# Altium PCB PCB1.PcbDoc (part 1 of 12)
Units mm, origin at the board's own origin, x right, y up, seen from the top; angles counter-clockwise.
Board outline 122.17 x 121.67 mm, 2 copper layers (Top Layer, Bottom Layer); 274 components, 225 nets, 941 pads, 421 vias.
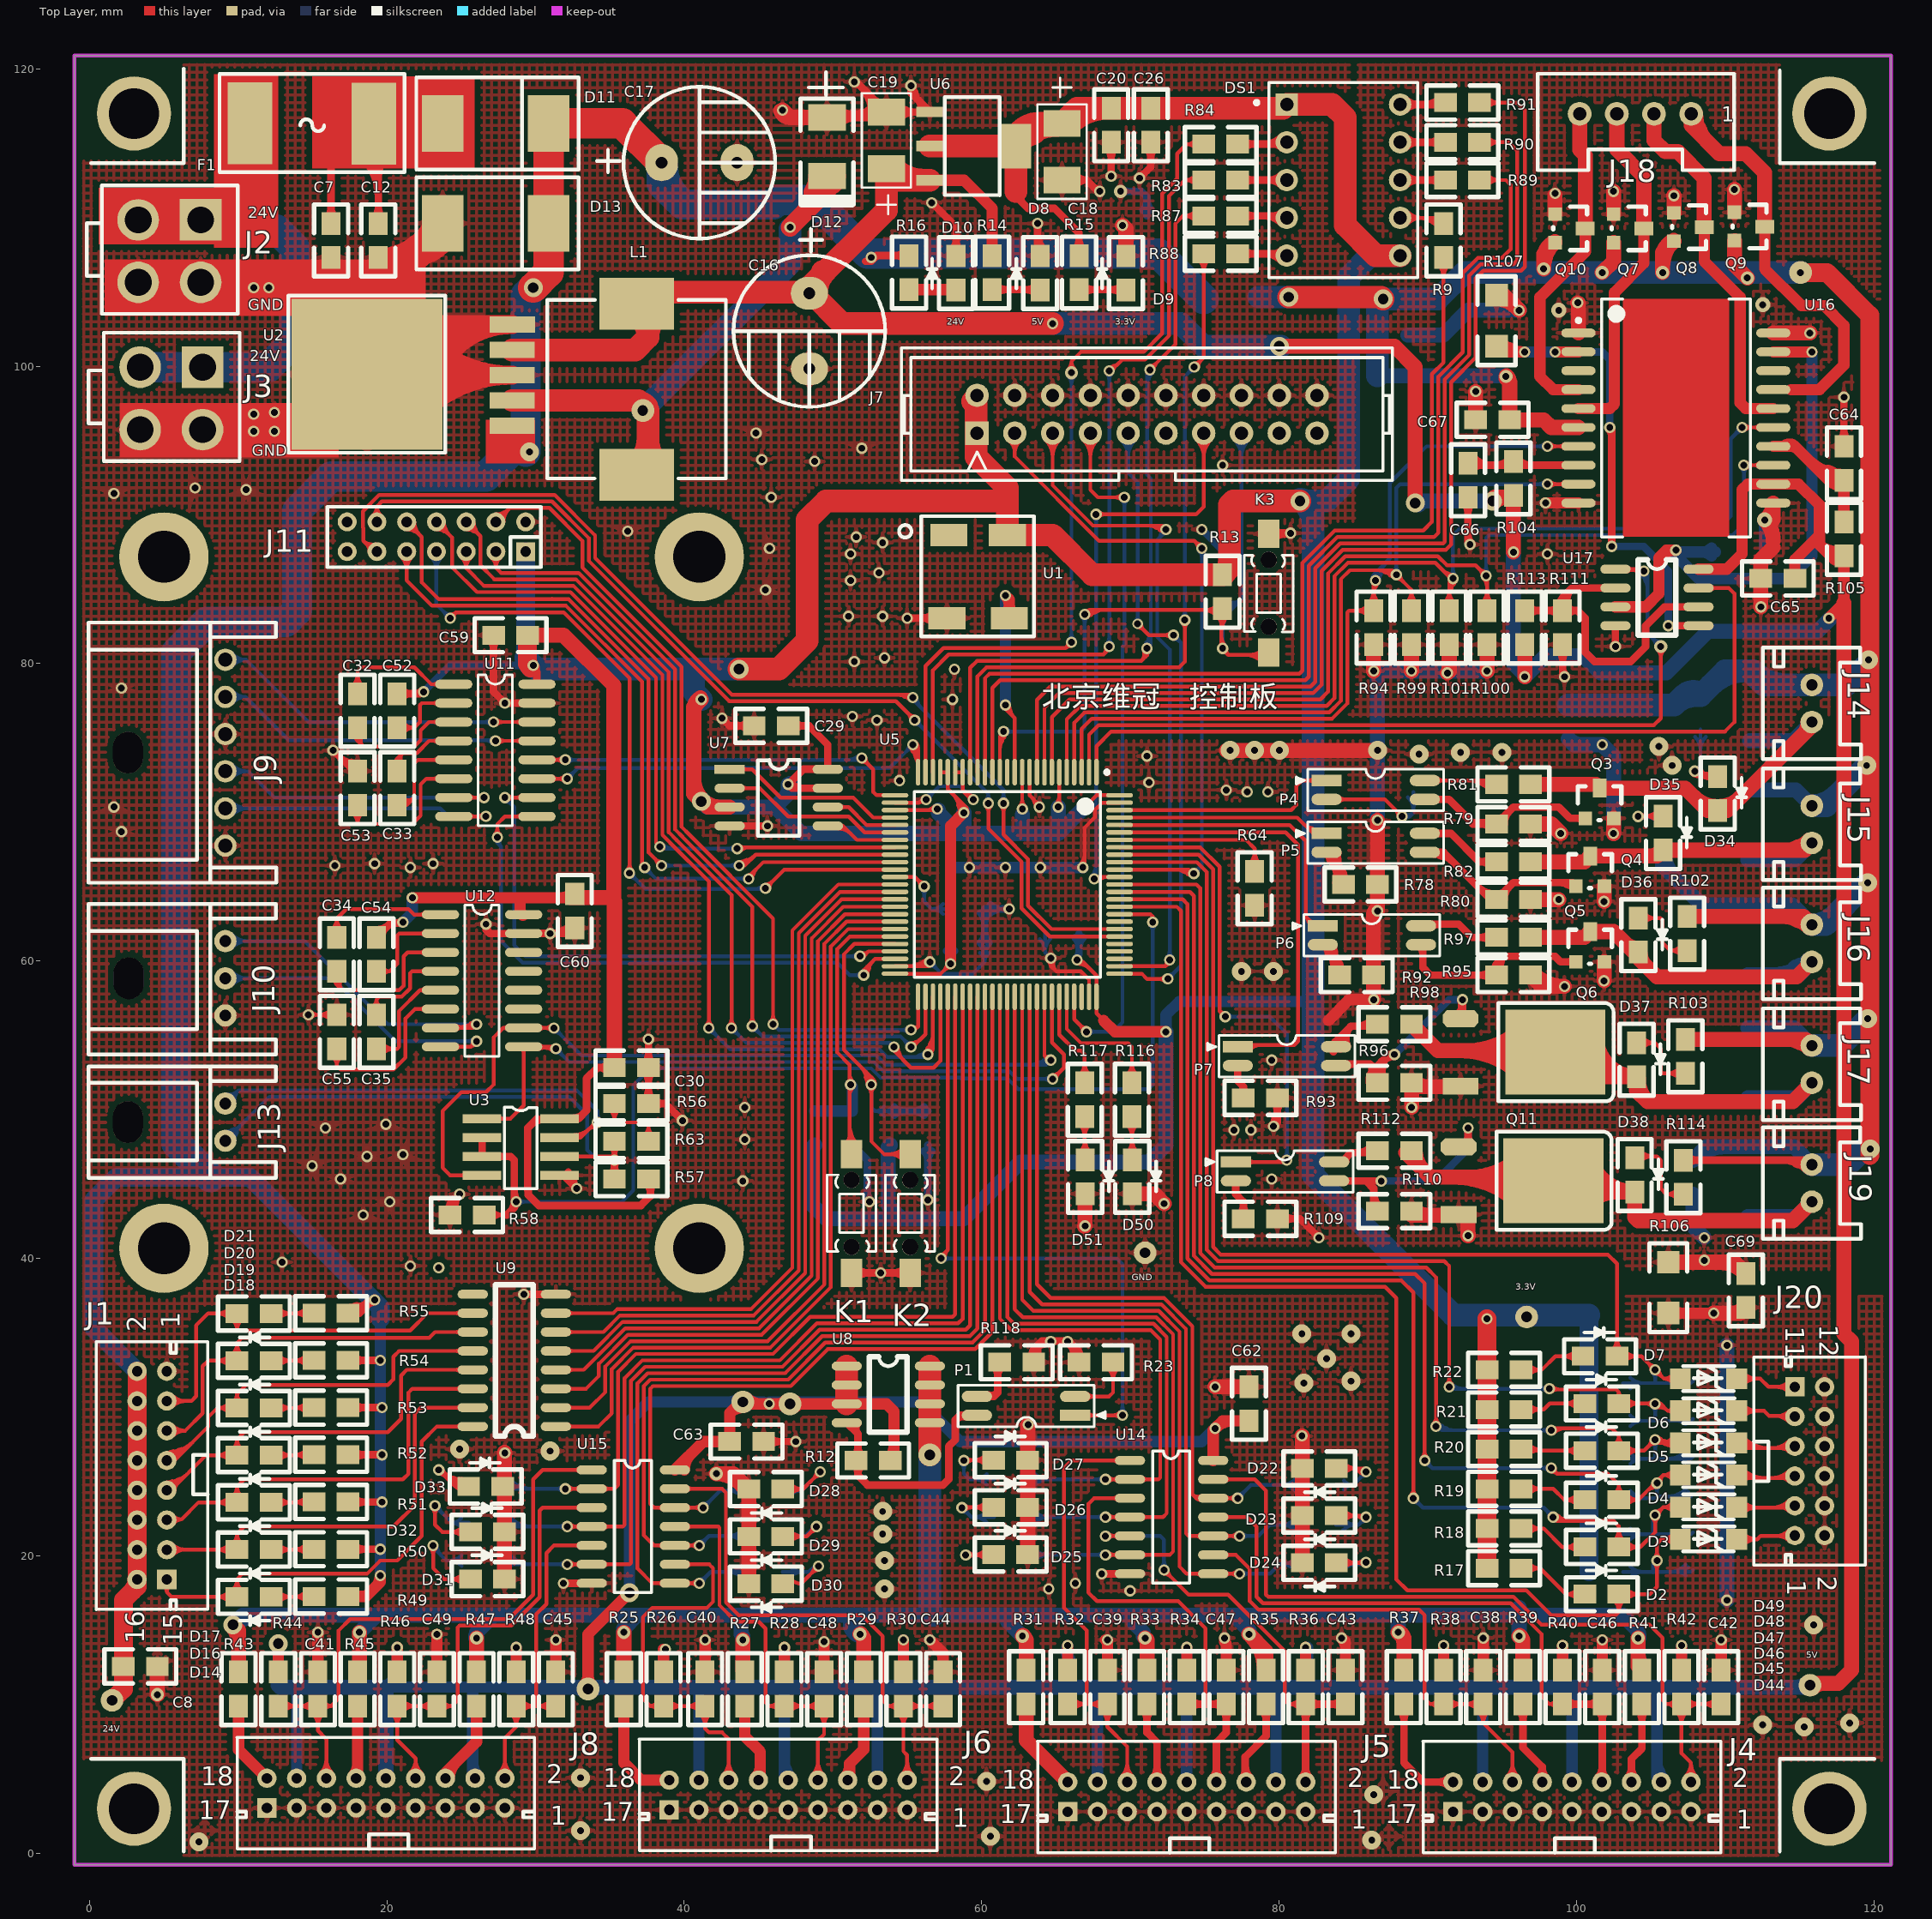
[diagram p0: Top Layer view]
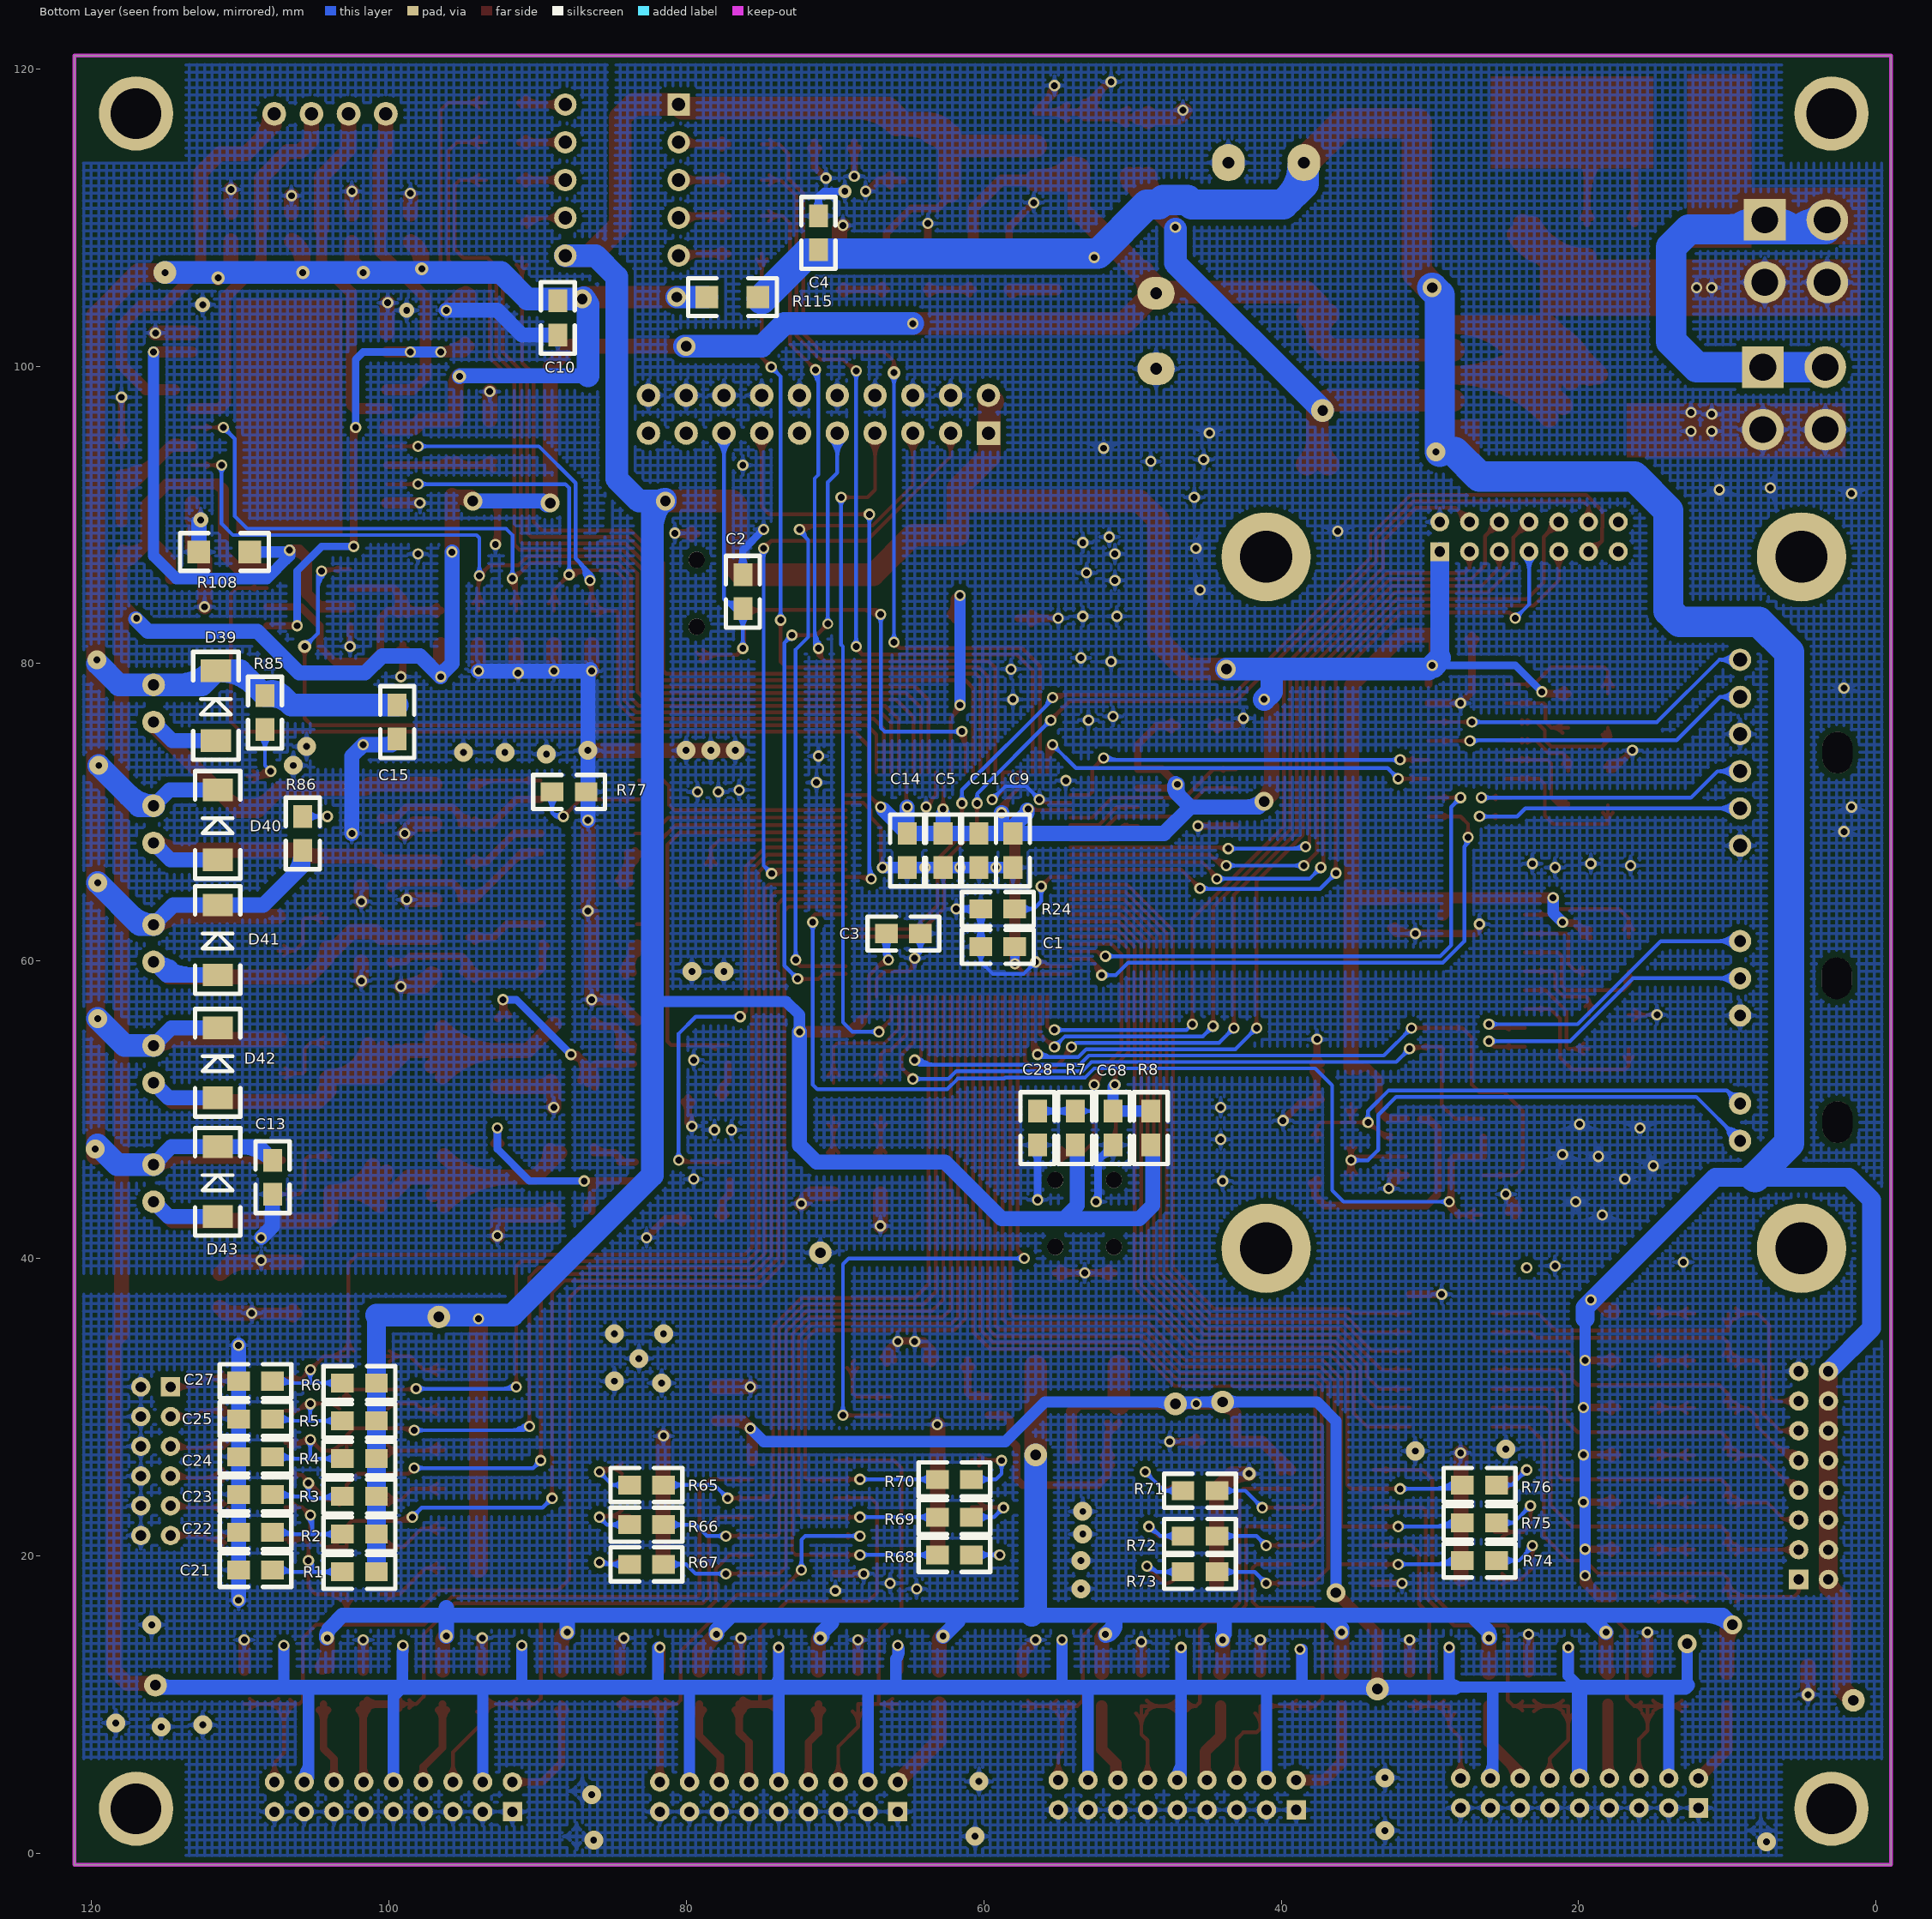
[diagram p1: Bottom Layer view, seen from below]

## Layer stack, top to bottom
Top Layer: signal copper 0.0356
Dielectric: core 0.32, FR-4, Dk 4.8
Bottom Layer: signal copper 0.0356

## Board outline
-1.016,-0.762 -1.016,120.904 121.158,120.904 121.158,-0.762

## Design rules (kind name [scope] priority, off if disabled: settings)
Clearance [All] p1: gap=0.178
ComponentClearance [All] p1 off: gap=0.254 collisioncheckmode=3 verticalgap=0.254 showdistances=FALSE
PolygonConnect [All] p1: connectstyle=Relief reliefconductorwidth=0.254 reliefentries=4 polygonreliefangle="90 Angle" airgapwidth=0.254
RoutingVias [All] p1: holewidth=2.54 width=1.27 viastyle="Through Hole" minholewidth=0.254 minwidth=0.508 maxholewidth=0.711 maxwidth=5.08
SilkToSilkClearance [All] p1 off: silktosilkclearance=0.254
SolderMaskExpansion [All] p1: expansion=0.102
Width [All] p1: maxlimit=2.54 minlimit=0.025 preferedwidth=0.254
26 further rules are at their usual default settings.

## Components (designator, comment, footprint, x,y, rotation, side; value= is the part's Value field where it differs from the comment)
C1 "100nF-0805-50V-20%" 0805 57.912,60.96 r0 bottom
C2 "100nF-0805-50V-20%" 0805 76.2,85.979 r270 bottom
C3 "100nF-0805-50V-20%" 0805 66.548,61.849 r180 bottom
C4 "100nF-0805-50V-20%" 0805 71.12,107.823 r90 bottom
C5 "100nF-0805-50V-20%" 0805 62.738,66.294 r90 bottom
C7 "100nF-0805-50V-20%" 0805 16.256,109.601 r270 top
C8 "100nF-0805-50V-20%" 0805 2.286,12.573 r0 top
C9 "100nF-0805-50V-20%" 0805 58.039,68.58 r270 bottom
C10 "100nF-0805-50V-20%" 0805 88.646,104.394 r270 bottom
C11 "100nF-0805-50V-20%" 0805 60.325,68.58 r270 bottom
C12 "10nF-0805-50V-20%" 0805 19.431,109.601 r270 top
C13 "100nF-0805-50V-20%" 0805 107.823,46.609 r270 bottom
C14 "100nF-0805-50V-20%" 0805 65.151,68.58 r270 bottom
C15 "100nF-0805-50V-20%" 0805 99.441,77.216 r270 bottom
C16 "'16V-YXA-330UF-20%  8*11.5" RB.2/.4 48.514,102.616 r0 top
C17 "35YXF1000MEFC1V12.5*25" RB.2/.4 40.767,113.792 r90 top
C18 "10uF-1411-16V-20%" 1411-B 65.405,116.332 r270 top
C19 "10uF-1411-16V-20%" 1411-B 53.594,113.284 r90 top
C20 "100nF-0805-50V-20%" 0805 68.707,117.348 r270 top
C21 "100nF-0805-50V-20%" 0805 110.109,19.05 r180 bottom
C22 "100nF-0805-50V-20%" 0805 110.109,21.59 r180 bottom
C23 "100nF-0805-50V-20%" 0805 110.109,24.13 r180 bottom
C24 "100nF-0805-50V-20%" 0805 110.109,26.67 r180 bottom
C25 "100nF-0805-50V-20%" 0805 110.109,29.21 r180 bottom
C26 "10nF-0805-50V-20%" 0805 71.374,117.348 r270 top
C27 "100nF-0805-50V-20%" 0805 110.109,31.75 r180 bottom
C28 "100nF-0805-50V-20%" 0805 56.388,49.911 r270 bottom
C29 "100nF-0805-50V-20%" 0805 46.99,75.819 r180 top
C30 "100nF-0805-50V-20%" 0805 35.306,52.832 r0 top
C32 "100nF-0805-50V-20%" 0805 18.034,75.692 r90 top
C33 "100nF-0805-50V-20%" 0805 20.701,72.771 r270 top
C34 "100nF-0805-50V-20%" 0805 16.637,59.309 r90 top
C35 "100nF-0805-50V-20%" 0805 19.304,56.388 r270 top
C38 "1nF-0805-50V-20%" 0805 93.726,10.033 r90 top
C39 "1nF-0805-50V-20%" 0805 68.453,10.033 r90 top
C40 "1nF-0805-50V-20%" 0805 41.402,9.906 r90 top
C41 "1nF-0805-50V-20%" 0805 15.367,9.906 r90 top
C42 "1nF-0805-50V-20%" 0805 109.728,10.033 r90 top
C43 "1nF-0805-50V-20%" 0805 84.455,10.033 r90 top
C44 "1nF-0805-50V-20%" 0805 57.404,9.906 r90 top
C45 "1nF-0805-50V-20%" 0805 31.369,9.906 r90 top
C46 "1nF-0805-50V-20%" 0805 101.727,10.033 r90 top
C47 "1nF-0805-50V-20%" 0805 76.454,10.033 r90 top
C48 "1nF-0805-50V-20%" 0805 49.403,9.906 r90 top
C49 "1nF-0805-50V-20%" 0805 23.368,9.906 r90 top
C52 "100nF-0805-50V-20%" 0805 20.701,75.692 r90 top
C53 "100nF-0805-50V-20%" 0805 18.034,70.485 r90 top
C54 "100nF-0805-50V-20%" 0805 19.304,59.309 r90 top
C55 "100nF-0805-50V-20%" 0805 16.637,54.102 r90 top
C59 "100nF-0805-50V-20%" 0805 29.464,81.915 r180 top
C60 "100nF-0805-50V-20%" 0805 32.639,64.516 r270 top
C62 "100nF-0805-50V-20%" 0805 77.978,29.083 r90 top
C63 "100nF-0805-50V-20%" 0805 43.053,27.686 r0 top
C64 "100nF-0805-50V-20%" 0805 117.983,92.329 r90 top
C65 "100nF-0805-50V-20%" 0805 114.681,85.725 r180 top
C66 "100nF-0805-50V-20%" 0805 92.71,91.186 r90 top
C67 "100nF-0805-50V-20%" 0805 95.504,96.393 r180 top
C68 "100nF-0805-50V-20%" 0805 51.308,49.911 r270 bottom
C69 "100nF-0805-50V-20%" 0805 111.379,36.703 r90 top
D2 "LED-0805-GREEN" LED-0805 100.584,17.526 r0 top
D3 "LED-0805-GREEN" LED-0805 100.584,20.701 r0 top
D4 "LED-0805-GREEN" LED-0805 100.584,23.876 r0 top
D5 "LED-0805-GREEN" LED-0805 100.584,27.178 r0 top
D6 "LED-0805-GREEN" LED-0805 100.584,30.353 r0 top
D7 "LED-0805-GREEN" LED-0805 100.457,33.528 r0 top
D8 "LED-0805-GREEN" LED-0805 63.834,105.156 r90 top
D9 "LED-0805-GREEN" LED-0805 69.596,105.156 r90 top
D10 "LED-0805-GREEN" LED-0805 58.166,105.156 r90 top
D11 "B540C" SMC 23.749,116.332 r0 top
D12 "1N5822" "IN5822 SMT" 49.403,114.808 r180 top
D13 "SMCJ30A-TR" SMC 23.749,109.601 r0 top
D14 "LED-0805-GREEN" LED-0805 12.192,17.145 r180 top
D16 "LED-0805-GREEN" LED-0805 12.192,20.32 r180 top
D17 "LED-0805-GREEN" LED-0805 12.192,23.495 r180 top
D18 "LED-0805-GREEN" LED-0805 12.192,26.67 r180 top
D19 "LED-0805-GREEN" LED-0805 12.192,29.845 r180 top
D20 "LED-0805-GREEN" LED-0805 12.192,33.02 r180 top
D21 "LED-0805-GREEN" LED-0805 12.192,36.195 r180 top
D22 "LED-0805-GREEN" LED-0805 83.82,25.781 r180 top
D23 "LED-0805-GREEN" LED-0805 83.82,22.606 r180 top
D24 "LED-0805-GREEN" LED-0805 83.82,19.431 r180 top
D25 "LED-0805-GREEN" LED-0805 60.833,20.193 r0 top
D26 "LED-0805-GREEN" LED-0805 60.833,23.368 r0 top
D27 "LED-0805-GREEN" LED-0805 60.833,26.543 r0 top
D28 "LED-0805-GREEN" LED-0805 46.609,24.384 r180 top
D29 "LED-0805-GREEN" LED-0805 46.609,21.209 r180 top
D30 "LED-0805-GREEN" LED-0805 46.609,18.034 r180 top
D31 "LED-0805-GREEN" LED-0805 25.654,18.542 r0 top
D32 "LED-0805-GREEN" LED-0805 25.654,21.717 r0 top
D33 "LED-0805-GREEN" LED-0805 25.527,24.765 r0 top
D34 "LED-0805-GREEN" LED-0805 109.601,72.39 r270 top
D35 "LED-0805-GREEN" LED-0805 105.918,69.723 r270 top
D36 "LED-0805-GREEN" LED-0805 104.267,62.865 r270 top
D37 "LED-0805-GREEN" LED-0805 104.14,54.483 r270 top
D38 "LED-0805-GREEN" LED-0805 104.013,46.736 r270 top
D39 "FR107" DO-214AC 111.633,74.803 r90 bottom
D40 "FR107" DO-214AC 111.506,66.802 r90 bottom
D41 "FR107" DO-214AC 111.506,59.055 r90 bottom
D42 "FR107" DO-214AC 111.506,50.8 r90 bottom
D43 "FR107" DO-214AC 111.506,42.799 r90 bottom
D44 "LL60P" DIODE 109.728,18.796 r270 top
D45 "LL60P" DIODE 109.728,20.955 r270 top
D46 "LL60P" DIODE 109.728,23.114 r270 top
D47 "LL60P" DIODE 109.728,25.273 r270 top
D48 "LL60P" DIODE 109.728,27.432 r270 top
D49 "LL60P" DIODE 109.728,29.591 r270 top
D50 "LED-0805-GREEN" LED-0805 70.231,46.609 r270 top
D51 "LED-0805-GREEN" LED-0805 67.056,46.609 r270 top
DS1 "SM430391N" LEDDIP-10 88.138,117.602 r0 top
F1 "FSMD185-2920" 2920 14.986,116.205 r180 top
J1 "A2008WVA-2X8P" A2008WVA-2X8P 5.207,18.415 r90 top
J2 "C4201WV-2*2P" "MX4 .2- 2*2P-180" 5.334,107.569 r0 top
J3 "C4201WV-2*2P" "MX4 .2- 2*2P-180" 5.461,97.663 r0 top
J4 "A2008WVA-2X9P" A2008WVA-2X9P 91.694,2.794 r0 top
J5 "A2008WVA-2X9P" A2008WVA-2X9P 65.786,2.794 r0 top
J6 "A2008WVA-2X9P" A2008WVA-2X9P 38.989,2.921 r0 top
J7 "A2547WV-N-2X10P" JTAG_20 71.12,96.774 r0 top
J8 "A2008WVA-2X9P" A2008WVA-2X9P 11.938,3.048 r0 top
J9 "A2508WR-F-6P" "2.5-6P  90 JXT" 9.144,80.264 r270 top
J10 "A2508WR-F-3P" "2.5-3P  90 JXT" 9.144,61.341 r270 top
J11 "IDC14-2.0-F" IDC14-2.0-F 29.337,89.535 r180 top
J13 "A2508WR-F-2P" "2.5-2P  90 JXT" 9.144,50.419 r270 top
J14 "A2508WV-2P" "2.5-2P  180 JXT" 115.824,76.073 r90 top
J15 "A2508WV-2P" "2.5-2P  180 JXT" 115.824,67.945 r90 top
J16 "A2508WV-2P" "2.5-2P  180 JXT" 115.824,59.944 r90 top
J17 "A2508WV-2P" "2.5-2P  180 JXT" 115.824,51.816 r90 top
J18 "A2508WV-4P" W143-4 100.203,116.967 r90 top
J19 "A2508WV-2P" "2.5-2P  180 JXT" 115.824,43.815 r90 top
J20 "A2008WVA-2X6P" A2008WVA-2X6P 114.681,31.369 r270 top
K1 "贴片2脚-3.5mm*6mm*5mm带定位" BUTTON2 51.308,42.926 r0 top (schematic designator k1)
K2 "贴片2脚-3.5mm*6mm*5mm带定位" BUTTON2 55.245,42.926 r0 top (schematic designator k2)
K3 "贴片2脚-3.5mm*6mm*5mm带定位" BUTTON2 79.248,84.836 r180 top
L1 "100uH 12*12*7" "INDUCTOR SMT7" 42.799,92.456 r90 top
P1 "EL3H7-G" SSOP4 62.992,30.099 r180 top
P4 "EL3H7-G" SSOP4 86.487,71.501 r0 top
P5 "EL3H7-G" SSOP4 86.487,67.945 r0 top
P6 "EL3H7-G" SSOP4 86.233,61.722 r0 top
P7 "EL3H7-G" SSOP4 80.518,53.594 r0 top
P8 "EL3H7-G" SSOP4 80.391,45.847 r0 top
Q3 "DTS4500" SOT-23 100.584,69.596 r0 top
Q4 "DTS4500" SOT-23 99.949,65.024 r0 top
Q5 "DTS4500" SOT-23 99.949,59.944 r0 top
Q6 "N沟道/IRFR024N" TO-252AA 92.202,56.134 r270 top
Q7 "BAV99" SOT-23 102.489,110.236 r270 top
Q8 "BAV99" SOT-23 106.549,110.324 r270 top
Q9 "BAV99" SOT-23 110.617,110.363 r270 top
Q10 "BAV99" SOT-23 98.552,110.236 r270 top
Q11 "N沟道/IRFR024N" TO-252AA 92.075,47.498 r270 top
R1 "10K-0805-5%" 0805 100.838,18.923 r0 bottom
R2 "10K-0805-5%" 0805 100.838,21.463 r0 bottom
R3 "10K-0805-5%" 0805 100.838,24.003 r0 bottom
R4 "10K-0805-5%" 0805 100.838,26.543 r0 bottom
R5 "10K-0805-5%" 0805 100.838,29.083 r0 bottom
R6 "10K-0805-5%" 0805 100.838,31.623 r0 bottom
R7 "10K-0805-5%" 0805 53.848,47.625 r90 bottom
R8 "10K-0805-5%" 0805 48.768,47.625 r90 bottom
R9 "270-0805-5%" 0805 91.059,107.315 r90 top
R12 "5.1K-0805-5%" 0805 53.848,26.416 r180 top
R13 "10K-0805-5%" 0805 76.2,83.693 r90 top
R14 "1.5K-0805-5%" 0805 60.706,107.442 r270 top
R15 "1K-0805-5%" 0805 66.548,107.442 r270 top
R16 "10K-0805-5%" 0805 55.118,107.442 r270 top
R17 "1K-0805-5%" 0805 93.98,19.177 r0 top
R18 "1K-0805-5%" 0805 93.98,21.844 r0 top
R19 "1K-0805-5%" 0805 93.98,24.511 r0 top
R20 "1K-0805-5%" 0805 93.98,27.178 r0 top
R21 "1K-0805-5%" 0805 93.98,29.845 r0 top
R22 "1K-0805-5%" 0805 93.98,32.512 r0 top
R23 "510-0805-5%" 0805 68.834,33.02 r180 top
R24 "100K-0805-5%" 0805 60.198,63.5 r180 bottom
R25 "1K-0805-5%" 0805 35.941,12.192 r270 top
R26 "5.1K-0805-5%" 0805 38.608,12.192 r270 top
R27 "100-0805-5%" 0805 44.069,12.192 r270 top
R28 "5.1K-0805-5%" 0805 46.736,12.192 r270 top
R29 "100-0805-5%" 0805 52.07,12.192 r270 top
R30 "5.1K-0805-5%" 0805 54.737,12.192 r270 top
R31 "1K-0805-5%" 0805 62.992,12.319 r270 top
R32 "5.1K-0805-5%" 0805 65.786,12.319 r270 top
R33 "1K-0805-5%" 0805 71.12,12.319 r270 top
R34 "5.1K-0805-5%" 0805 73.787,12.319 r270 top
R35 "1K-0805-5%" 0805 79.121,12.319 r270 top
R36 "5.1K-0805-5%" 0805 81.788,12.319 r270 top
R37 "1K-0805-5%" 0805 88.392,12.319 r270 top
R38 "5.1K-0805-5%" 0805 91.059,12.319 r270 top
R39 "100-0805-5%" 0805 96.393,12.319 r270 top
R40 "5.1K-0805-5%" 0805 99.06,12.319 r270 top
R41 "100-0805-5%" 0805 104.394,12.319 r270 top
R42 "5.1K-0805-5%" 0805 107.061,12.319 r270 top
R43 "1K-0805-5%" 0805 10.033,12.192 r270 top
R44 "5.1K-0805-5%" 0805 12.7,12.192 r270 top
R45 "1K-0805-5%" 0805 18.034,12.192 r270 top
R46 "5.1K-0805-5%" 0805 20.701,12.192 r270 top
R47 "1K-0805-5%" 0805 26.035,12.192 r270 top
R48 "5.1K-0805-5%" 0805 28.702,12.192 r270 top
R49 "5.1K-0805-5%" 0805 15.113,17.272 r0 top
R50 "5.1K-0805-5%" 0805 15.113,20.447 r0 top
R51 "5.1K-0805-5%" 0805 15.113,23.622 r0 top
R52 "5.1K-0805-5%" 0805 15.113,26.797 r0 top
R53 "5.1K-0805-5%" 0805 15.113,29.972 r0 top
R54 "5.1K-0805-5%" 0805 15.113,33.147 r0 top
R55 "5.1K-0805-5%" 0805 15.113,36.322 r0 top
R56 "4.7K-0805-5%" 0805 37.592,50.419 r180 top
R57 "4.7K-0805-5%" 0805 35.306,45.339 r0 top
R58 "10K-0805-5%" 0805 24.257,42.926 r0 top
R63 "120-0805-5%" 0805 37.592,47.879 r180 top
R64 "100K-0805-5%" 0805 78.359,63.754 r90 top
R65 "5.1K-0805-5%" 0805 81.534,24.765 r0 bottom
R66 "5.1K-0805-5%" 0805 81.534,22.098 r0 bottom
R67 "5.1K-0805-5%" 0805 81.534,19.431 r0 bottom
R68 "5.1K-0805-5%" 0805 63.119,20.066 r180 bottom
R69 "5.1K-0805-5%" 0805 63.119,22.606 r180 bottom
R70 "5.1K-0805-5%" 0805 63.119,25.146 r180 bottom
R71 "5.1K-0805-5%" 0805 44.323,24.384 r0 bottom
R72 "5.1K-0805-5%" 0805 44.323,21.336 r0 bottom
R73 "5.1K-0805-5%" 0805 44.323,18.923 r0 bottom
R74 "5.1K-0805-5%" 0805 27.813,19.685 r180 bottom
R75 "5.1K-0805-5%" 0805 27.813,22.225 r180 bottom
R76 "5.1K-0805-5%" 0805 27.813,24.765 r180 bottom
R77 "510-0805-5%" 0805 89.027,71.374 r180 bottom
R78 "510-0805-5%" 0805 84.328,65.151 r0 top
R79 "10K-0805-5%" 0805 94.615,69.215 r0 top
R80 "10K-0805-5%" 0805 94.615,64.135 r0 top
R81 "1K-0805-5%" 0805 94.615,71.882 r0 top
R82 "1K-0805-5%" 0805 94.615,66.675 r0 top
R83 "270-0805-5%" 0805 74.93,112.522 r0 top
R84 "270-0805-5%" 0805 74.93,114.935 r0 top
R85 "10K-0805-5%" 0805 108.331,77.851 r270 bottom
R86 "10K-0805-5%" 0805 105.791,67.437 r90 bottom
R87 "270-0805-5%" 0805 74.93,110.109 r0 top
R88 "270-0805-5%" 0805 74.93,107.569 r0 top
R89 "270-0805-5%" 0805 93.472,112.522 r180 top
R90 "270-0805-5%" 0805 93.472,115.062 r180 top
R91 "270-0805-5%" 0805 93.472,117.729 r180 top
R92 "510-0805-5%" 0805 84.074,59.055 r0 top
R93 "510-0805-5%" 0805 77.597,50.8 r0 top
R94 "10K-0805-5%" 0805 86.36,81.28 r90 top
R95 "10K-0805-5%" 0805 94.615,59.055 r0 top
R96 "10K-0805-5%" 0805 86.614,51.816 r0 top
R97 "1K-0805-5%" 0805 94.615,61.595 r0 top
R98 "10K-0805-5%" 0805 86.614,55.753 r0 top
R99 "10K-0805-5%" 0805 88.9,81.28 r90 top
R100 "10K-0805-5%" 0805 93.98,81.28 r90 top
R101 "10K-0805-5%" 0805 91.44,81.28 r90 top
R102 "10K-0805-5%" 0805 107.442,62.992 r270 top
R103 "10K-0805-5%" 0805 107.315,54.737 r270 top
R104 "10K-0805-5%" 0805 95.758,91.313 r90 top
R105 "10K-0805-5%" 0805 117.983,87.249 r90 top
R106 "0R-1206-5%" 1206 106.172,39.751 r270 top
R107 "1R5-1206-5%" 1206 94.615,101.346 r90 top
R108 "1R5-1206-5%" 1206 109.347,87.503 r0 bottom
R109 "510-0805-5%" 0805 77.597,42.672 r0 top
R110 "10K-0805-5%" 0805 86.614,43.18 r0 top
R111 "10K-0805-5%" 0805 99.06,83.566 r270 top
R112 "10K-0805-5%" 0805 86.614,47.244 r0 top
R113 "10K-0805-5%" 0805 96.52,81.28 r90 top
R114 "10K-0805-5%" 0805 107.188,46.609 r270 top
R115 "0R-1206-5%" 1206 78.613,104.648 r180 bottom
R116 "1K-0805-5%" 0805 70.104,51.816 r270 top
R117 "1K-0805-5%" 0805 66.929,51.816 r270 top
R118 "1K-0805-5%" 0805 63.5,33.02 r180 top
U1 "HXO-36B-8MHZ-7.0*5.0*1.5-SMD" OSC_4_S 57.785,88.646 r0 top
U2 "LM2576-5" TO-263 22.733,100.076 r90 top
U3 "MAX3485" SOP8 26.416,49.276 r0 top
U5 "STM32F103VET6" LQFP100_N 61.722,65.151 r270 top
U6 "LM1117MPX-3.3" SOT-223-3L 56.515,114.808 r0 top
U7 "W25Q64" SO-8M 43.053,72.898 r0 top
U8 "IRF7404PBF" SO-8 50.927,32.766 r0 top
U9 "ULN2003A" SO-16 31.369,28.702 r180 top
U11 "MAX3232ESE" SOIC-16 24.511,78.613 r0 top
U12 "MAX3232ESE" SOIC-16 23.618,63.123 r0 top
U14 "74HC14D" SO-14 69.977,26.416 r0 top
U15 "74HC14D" SO-14 33.782,25.781 r0 top
U16 "L298P" POWERSO20_N 106.68,96.52 r0 top
U17 "LM393AD" SO-8 102.616,86.36 r0 top

## Footprints (in the part's own frame and the unit in brackets; to place one, negate y for a bottom-side part, rotate by r counter-clockwise, add the part's x,y. Pads: shape width x height; smd on the part's side, far side on the other; paste and mask are expansions set on the pad)
"2.5-2P  90 JXT" [mm] "Connector; Header; 2 Position; Right Angle"
  oval 2.8x2 hole 2 slot 2.8 at 0 deg: 0(1.25,-6.55)
  round 1.5 hole 0.8: 1(0,0) 2(2.5,0)
  silkscreen extent -2.5,-9.2 5,3.4
"2.5-2P  180 JXT" [mil]
  round 60 hole 30: 1(98.43,0) 2(0,0)
  silkscreen extent -98,-130 197,130
"2.5-3P  90 JXT" [mm] "Connector; Header; 3 Position; Right Angle"
  oval 2.8x2 hole 2 slot 2.8 at 0 deg: 0(2.5,-6.5)
  round 1.5 hole 0.8: 1(0,0) 2(2.5,0) 3(5,0)
  silkscreen extent -2.5,-9.2 7.62,3.4
"2.5-6P  90 JXT" [mm] "Connector; Header; 3 Position; Right Angle"
  oval 2.8x2 hole 2 slot 2.8 at 0 deg: 0(6.25,-6.55)
  round 1.5 hole 0.95: 1(0,0) 2(2.5,0) 3(5,0) 4(7.5,0) 5(10,0) 6(12.5,0)
  silkscreen extent -2.5,-9.2 15,3.43
0805 [mil]
  rect 60x50 smd: 1(0,0) 2(90,0)
  silkscreen extent -50,-45 140,45
1206 [mil]
  rect 60x60 smd: 1(0,0) 2(135,0)
  silkscreen extent -50,-50 185,50
1411-B [mm]
  rect 1.8x2.5 smd: 1(0,0) 2(3.81,0)
  silkscreen extent -3.05,-1.65 5.08,1.65
2920 [mm]
  rect 3x5.5 smd: 1(4.199,-0.142) 2(-4.158,-0.117)
  silkscreen extent -6.22,-3.44 6.23,3.16
A2008WVA-2X6P [mm] "Connector; Header; 8x2 Position"
  rect 1.3x1.3 hole 0.7: 1(0,0)
  round 1.3 hole 0.7: 2(0,2) 3(2,0) 4(2,2) 5(4,0) 6(4,2) 7(6,0) 8(6,2) 9(8,0) 10(8,2) 11(10,0) 12(10,2)
  silkscreen extent -2.03,-2.75 12,4.75
A2008WVA-2X8P [mm] "Connector; Header; 8x2 Position"
  rect 1.3x1.3 hole 0.7: 1(0,0)
  round 1.3 hole 0.7: 2(0,2) 3(2,0) 4(2,2) 5(4,0) 6(4,2) 7(6,0) 8(6,2) 9(8,0) 10(8,2) 11(10,0) 12(10,2) 13(12,0) 14(12,2) 15(14,0) 16(14,2)
  silkscreen extent -2.03,-2.75 16,4.75
A2008WVA-2X9P [mm] "Connector; Header; 8x2 Position"
  rect 1.3x1.3 hole 0.7: 1(0,0)
  round 1.3 hole 0.7: 2(0,2) 3(2,0) 4(2,2) 5(4,0) 6(4,2) 7(6,0) 8(6,2) 9(8,0) 10(8,2) 11(10,0) 12(10,2) 13(12,0) 14(12,2) 15(14,0) 16(14,2) 17(16,0) 18(16,2)
  silkscreen extent -2.03,-2.75 18,4.75
BUTTON2 [mm]
  round 1.1 hole 1.1: 0(-0.058,-2.145) 0(-0.058,2.355)
  rect 1.44x1.9 smd: 1(-0.058,-3.895) 2(-0.058,4.085)
  silkscreen extent -1.71,-2.46 1.59,2.69
DIODE [mm]
  rect 1.4x1.4 smd: A(-2.321,-2.754) K(-2.321,1.046)
  silkscreen extent -3.17,-2.55 -1.5,0.89
DO-214AC [mil]
  rect 60x80 smd: A(0.48,0.14) K(185.48,0.14)
  silkscreen extent -50,-60 235,60
IDC14-2.0-F [mm] "针型封装"
  round 6 hole 3.5: 0(-11.679,48.849) 0(-11.679,2.349) 0(24.321,48.849) 0(24.321,2.349)
  rect 1.27x1.27 hole 0.711: 1(0,2)
  round 1.27 hole 0.711: 2(0,0) 3(2,2) 4(2,0) 5(4,2) 6(4,0) 7(6,2) 8(6,0) 9(8,2) 10(8,0) 11(10,2) 12(10,0) 13(12,2) 14(12,0)
  silkscreen extent -1.02,-1.02 13.33,3.05
"IN5822 SMT" [mil]
  rect 100x70 smd: 1(-7.7,-75.6) 2(-7.7,79.4)
  silkscreen extent -78,-195 62,154
"INDUCTOR SMT7" [mm]
  rect 3.5x5 smd: 1(0.25,6) 2(11.75,6)
  silkscreen extent 0,0 12,12
JTAG_20 [mil]
  rect 62x62 hole 35: 1(-450,-50)
  round 62 hole 35: 2(-450,50) 3(-350,-50) 4(-350,50) 5(-250,-50) 6(-250,50) 7(-150,-50) 8(-150,50) 9(-50,-50) 10(-50,50) 11(50,-50) 12(50,50) 13(150,-50) 14(150,50) 15(250,-50) 16(250,50) 17(350,-50) 18(350,50) 19(450,-50) 20(450,50)
  silkscreen extent -650,-175 650,175
LED-0805 [mil]
  rect 60x50 smd: 1(-0.93,-4.09) 2(89.07,-4.09)
  silkscreen extent -51,-49 139,71
LEDDIP-10 [mm] "LED, 7-Segment Display, 7.62 mm, RHD; 10 Leads; Row Space 5.08 mm; Pitch 2.54 mm"
  rect 1.5x1.5 hole 0.9: 1(-7.62,0)
  round 1.5 hole 0.9: 2(-7.62,-2.54) 3(-7.62,-5.08) 4(-7.62,-7.62) 5(-7.62,-10.16) 6(0,-10.16) 7(0,-7.62) 8(0,-5.08) 9(0,-2.54) 10(0,0)
  silkscreen extent -9.77,-11.63 1.19,1.47
LQFP100_N [mm] "Thin QFP, 100-Leads, Body 14x14mm, Pitch 0.5mm, IPC Medium Density"
  oval 1.8x0.3 smd: 1(-7.55,6) 2(-7.55,5.5) 3(-7.55,5) 4(-7.55,4.5) 5(-7.55,4) 6(-7.55,3.5) 7(-7.55,3) 8(-7.55,2.5) 9(-7.55,2) 10(-7.55,1.5) 11(-7.55,1) 12(-7.55,0.5) 13(-7.55,0) 14(-7.55,-0.5) 15(-7.55,-1) 16(-7.55,-1.5) 17(-7.55,-2) 18(-7.55,-2.5) 19(-7.55,-3) 20(-7.55,-3.5) 21(-7.55,-4) 22(-7.55,-4.5) 23(-7.55,-5) 24(-7.55,-5.5) 25(-7.55,-6) 51(7.55,-6) 52(7.55,-5.5) 53(7.55,-5) 54(7.55,-4.5) 55(7.55,-4) 56(7.55,-3.5) 57(7.55,-3) 58(7.55,-2.5) 59(7.55,-2) 60(7.55,-1.5) 61(7.55,-1) 62(7.55,-0.5) 63(7.55,0) 64(7.55,0.5) 65(7.55,1) 66(7.55,1.5) 67(7.55,2) 68(7.55,2.5) 69(7.55,3) 70(7.55,3.5) 71(7.55,4) 72(7.55,4.5) 73(7.55,5) 74(7.55,5.5) 75(7.55,6)
  oval 0.3x1.8 smd: 26(-6,-7.55) 27(-5.5,-7.55) 28(-5,-7.55) 29(-4.5,-7.55) 30(-4,-7.55) 31(-3.5,-7.55) 32(-3,-7.55) 33(-2.5,-7.55) 34(-2,-7.55) 35(-1.5,-7.55) 36(-1,-7.55) 37(-0.5,-7.55) 38(0,-7.55) 39(0.5,-7.55) 40(1,-7.55) 41(1.5,-7.55) 42(2,-7.55) 43(2.5,-7.55) 44(3,-7.55) 45(3.5,-7.55) 46(4,-7.55) 47(4.5,-7.55) 48(5,-7.55) 49(5.5,-7.55) 50(6,-7.55) 76(6,7.55) 77(5.5,7.55) 78(5,7.55) 79(4.5,7.55) 80(4,7.55) 81(3.5,7.55) 82(3,7.55) 83(2.5,7.55) 84(2,7.55) 85(1.5,7.55) 86(1,7.55) 87(0.5,7.55) 88(0,7.55) 89(-0.5,7.55) 90(-1,7.55) 91(-1.5,7.55) 92(-2,7.55) 93(-2.5,7.55) 94(-3,7.55) 95(-3.5,7.55) 96(-4,7.55) 97(-4.5,7.55) 98(-5,7.55) 99(-5.5,7.55) 100(-6,7.55)
  silkscreen extent -7.67,-6.25 6.25,6.83, body extent -7,-7 7,7, height 1.6
"MX4 .2- 2*2P-180" [mm]
  rect 2.8x2.8 hole 1.8: 1(2.15,2.275)
  round 2.8 hole 1.8: 2(2.15,-1.925) 3(-2.05,2.275) 4(-2.05,-1.925)
  silkscreen extent -5.51,-4.04 4.65,4.59
OSC_4_S [mm]
  rect 2.5x1.5 smd: 1(0.012,0.002) 2(-0.115,-5.586) 3(4.076,-5.586) 4(3.949,0.002)
  silkscreen extent -3.34,-6.81 5.74,1.27
POWERSO20_N [mm] "SOP, 20-Leads, Body 15.9x11mm, Pitch 1.27mm, IPC Medium Density"
  oval 2.3x0.6 smd: 1(-6.55,5.715) 2(-6.55,4.445) 3(-6.55,3.175) 4(-6.55,1.905) 5(-6.55,0.635) 6(-6.55,-0.635) 7(-6.55,-1.905) 8(-6.55,-3.175) 9(-6.55,-4.445) 10(-6.55,-5.715) 11(6.55,-5.715) 12(6.55,-4.445) 13(6.55,-3.175) 14(6.55,-1.905) 15(6.55,-0.635) 16(6.55,0.635) 17(6.55,1.905) 18(6.55,3.175) 19(6.55,4.445) 20(6.55,5.715)
  Top Layer region: -3.575,-8 3.575,-8 3.575,8 -3.575,8
  silkscreen extent -6.67,-8 5,8, body extent -5.55,-8 5.55,8, height 3.6
RB.2/.4 [mm]
  oval 2.5x2.2 hole 0.8: 1(-0.102,2.288) 2(-0.102,-2.792)
  silkscreen extent -5.2,-5.35 5,6.64
SMC [mil]
  rect 110x150 smd: 1(0.48,0.14) 2(280.48,0.14)
  silkscreen extent -70,-122 360,122
SO-8 [mil]
  oval 80x24 smd: 1(0,0) 2(0,-50) 3(0,-100) 4(0,-150) 5(220,-150) 6(220,-100) 7(220,-50) 8(220,0)
  silkscreen extent 60,-175 160,25
SO-8M [mil]
  rect 80x24 smd: 1(0,0)
  oval 80x24 smd: 2(0,-50) 3(0,-100) 4(0,-150) 5(259.84,-150) 6(259.84,-100) 7(259.84,-50) 8(259.84,0)
  silkscreen extent 74,-176 185,25
SO-14 [mil]
  oval 80x24 smd: 1(0,0) 2(0,-50) 3(0,-100) 4(0,-150) 5(0,-200) 6(0,-250) 7(0,-300) 8(220,-300) 9(220,-250) 10(220,-200) 11(220,-150) 12(220,-100) 13(220,-50) 14(220,0)
  silkscreen extent 60,-325 158,25
SO-16 [mil]
  oval 80x24 smd: 1(0,0) 2(0,-50) 3(0,-100) 4(0,-150) 5(0,-200) 6(0,-250) 7(0,-300) 8(0,-350) 9(220,-350) 10(220,-300) 11(220,-250) 12(220,-200) 13(220,-150) 14(220,-100) 15(220,-50) 16(220,0)
  silkscreen extent 60,-375 160,25
SOIC-16 [mm]
  oval 2.5x0.61 smd: 1(-0.004,0.004) 2(-0.004,-1.266) 3(-0.004,-2.536) 4(-0.004,-3.806) 5(-0.004,-5.076) 6(-0.004,-6.346) 7(-0.004,-7.616) 8(-0.004,-8.886) 9(5.584,-8.886) 10(5.584,-7.616) 11(5.584,-6.346) 12(5.584,-5.076) 13(5.584,-3.806) 14(5.584,-2.536) 15(5.584,-1.266) 16(5.584,0.004)
  silkscreen extent 1.63,-9.52 3.94,0.64
SOP8 [mm] "Small Outline; 8 Leads; Body Width 4.3 mm; Pitch 1.27 mm"
  rect 2.6x0.6 smd: 1(-0.009,0.127) 2(-0.009,-1.143) 3(-0.009,-2.413) 4(-0.009,-3.683) 5(5.191,-3.683) 6(5.191,-2.413) 7(5.191,-1.143) 8(5.191,0.127)
  silkscreen extent 1.49,-4.57 3.69,0.89
SOT-23 [mil]
  rect 36x36 smd: 1(0.48,0.14) 2(75.48,0.14)
  rect 36x50 smd: 3(38.48,80.14)
  silkscreen extent -20,-5 95,85
SOT-223-3L [mm] "LM1117"
  rect 1.8x0.7 smd: 1(0,2.3) 2(0,0) 3(0,-2.3)
  rect 2x3 smd: 4(5.8,0)
  silkscreen extent 1.02,-3.3 4.7,3.3
SSOP4 [mil]
  rect 80x30 smd: 1(-129.69,25.43)
  oval 80x30 smd: 2(-129.69,-24.57) 3(130.31,-24.57) 4(130.31,25.43)
  silkscreen extent -210,-55 180,55
TO-252AA [mil]
  oct 45x95 smd: 1(0,0)
  rect 225x265 smd: 2(89,251)
  rect 45x95 smd: 3(179,0)
  silkscreen extent -41,100 219,405, body extent -37,-4 219,390, height 87
TO-263 [mm]
  rect 10.16x10.16 smd: 0(-0.61,4.064)
  rect 1.1x3.048 smd: 1(-4.076,-5.7) 2(-2.376,-5.7) 3(-0.676,-5.7) 4(1.024,-5.7) 5(2.726,-5.708)
  silkscreen extent -5.89,-1.19 4.67,9.35
W143-4 [mm]
  round 1.6 hole 0.9: 1(0.005,-7.506) 2(0.005,-5.006) 3(0.005,-2.506) 4(0.005,-0.006)
  silkscreen extent -3.79,-10.39 2.71,2.81

## Part data
C1 C2 C3 C4 C5 C7 C8 C9 C10 C11 C12 C13 C14 C15 C20 C21 C22 C23 C24 C25 C26 C27 C28 C29 C30 C32 C33 C34 C35 C38 C39 C40 C41 C42 C43 C44 C45 C46 C47 C48 C49 C52 C53 C54 C55 C59 C60 C62 C63 C64 C65 C66 C67 C68 C69: library part CAP, "Capacitor"
C16 C18 C19: library part "Cap Pol1", "Polarized Capacitor (Radial)"
C17: library part "CAPACITOR POL", "Capacitor"
D2 D3 D4 D5 D6 D7 D8 D9 D10 D14 D16 D17 D18 D19 D20 D21 D50 D51: library part LED0, "Typical INFRARED GaAs LED"
D11 D13: library part ZENER2, "Zener Diode"
D12: library part "D Schottky", "Schottky Diode"
D22 D23 D24 D25 D26 D27 D28 D29 D30 D31 D32 D33: library part LED
D34 D35 D36 D37 D38: library part DIODE, "Diode"
D39 D40 D41 D42 D43 D44 D45 D46 D47 D48 D49: library part 1N4148
DS1: library part "Dpy Amber-CA", "7.62 mm Black Surface Orange 7-Segment Display: CA, RH DP"
F1: library part FUSE2, "Fuse"
J1: library part "Header 8X2", "Header, 8-Pin, Dual row"
J2 J3 J18: library part CON4, "Connector"
J4 J5 J6 J8: library part "Header 9X2", "Header, 9-Pin, Dual row"
J7: library part JTAG
J9: library part "Header 6", "Header, 6-Pin"
J10: library part CON3, "Connector"
J11: library part "Header 7X2H", "Header, 7-Pin, Dual row, Right Angle"
J13 J14 J15 J16 J17 J19: library part CON2
J20: library part "Header 6X2", "Header, 6-Pin, Dual row"
K1 K2 K3: library part Switch, "Switch"
L1: library part Inductor, "Inductor"
P1 P4 P5 P6 P7 P8: library part OpticalCoupler, "OpticalCoupler"
Q3 Q4 Q5: library part "MOSFET N"
Q6 Q11: library part MOSFET-N, "N-Channel MOSFET"
R1 R2 R3 R4 R5 R6 R7 R8 R9 R17 R18 R19 R20 R21 R22: library part Res2
R12 R15 R16 R23 R65 R66 R67 R68 R69 R70 R71 R72 R73 R74 R75 R76 R83 R84 R87 R88 R89 R90 R91 R94 R99 R100 R101 R104 R105 R106 R107 R108 R111 R113 R115 R116 R117 R118: library part RES2
R13 R14 R24 R25 R26 R27 R28 R29 R30 R31 R32 R33 R34 R35 R36 R37 R38 R39 R40 R41 R42 R43 R44 R45 R46 R47 R48 R49 R50 R51 R52 R53 R54 R55 R56 R57 R58 R63 R64 R77 R78 R79 R80 R81 R82 R85 R86 R92 R93 R95 R96 R97 R98 R102 R103 R109 R110 R112 R114: library part Res2, "Resistor"
U1: library part CRYSTAL
U2: library part LM2576, "TO-263"
U8: library part sop8(IRF7404)
U9: library part ULN2003, "Darlinton BJT Array"
U11 U12: library part SPI3232E
U14 U15: library part 74HC04, "Hex Inverters"
U17: "Low-Power Dual Voltage Comparator"

## Free pads (board coordinates)
  round 5 hole 3.4: 0(3,3) 1(117,3) 2(117,117) 3(3,117)
  round 1.524 hole 0.711: 0(115.697,11.303) 1(1.524,10.287) 2(70.993,40.386) 3(96.647,36.068)

## Via types
v1: diameter 0.762, hole 0.457, Top Layer to Bottom Layer, 339 vias
v2: diameter 1.27, hole 0.457, Top Layer to Bottom Layer, 39 vias
v3: diameter 0.889, hole 0.457, Top Layer to Bottom Layer, 21 vias
v4: diameter 1.27, hole 0.711, Top Layer to Bottom Layer, 12 vias
v5: diameter 1.524, hole 0.711, Top Layer to Bottom Layer, 5 vias
v6: diameter 1.016, hole 0.457, Top Layer to Bottom Layer, 3 vias
v7: diameter 0.711, hole 0.457, Top Layer to Bottom Layer, 1 vias
v8: diameter 1.524, hole 0.457, Top Layer to Bottom Layer, 1 vias

## Nets (pads, with @x,y where several pads share a name; then routed paths per layer and width w, separated by ;. In a path a pad name is that pad's centre, name@x,y a point inside that pad or via, vN(x,y) a via of type N, cw(c..) or ccw(c..) an arc to the next point about the centre after c; other vN are vias at no path point)
5V_LED: R25.1 R27.1 R29.1 R31.1 R33.1 R35.1 R37.1 R39.1 R41.1 R43.1 R45.1 R47.1 U8.5 U8.6 U8.7 U8.8 | length 206.9
  Top Layer w1.016: v4(9.652,15.367) 10.033,14.986 R43.1@10.033,12.192 ; R45.1@18.034,12.192 18.161,12.319 v3(18.161,14.859) ; R47.1@26.035,12.192 v3(26.035,14.478) ; R25.1@35.941,12.192 v3(35.941,14.859) ; v3(43.942,14.351) 43.942,12.319 R27.1@44.069,12.192 ; v3(51.816,14.732) 52.07,14.478 R29.1@52.07,12.192 ; v3(62.738,14.605) 62.992,14.351 R31.1@62.992,12.319 ; v3(70.993,14.478) 71.12,14.351 R33.1@71.12,12.319 ; v3(77.978,14.732) 79.121,13.589 R35.1@79.121,12.319 ; v3(88.011,14.859) 88.392,14.478 R37.1@88.392,12.319 ; v3(96.139,14.605) 96.393,14.351 R39.1@96.393,12.319 ; R41.1@104.14,12.573 v3(104.14,14.478) ; v4@9.562,15.277 cw(c8.426,14.141) 10.033,14.141 ; v4@9.562,15.277 cw(c8.426,14.141) 10.033,14.141 ; v4@9.562,15.277 cw(c8.426,14.141) 10.033,14.141 ; v3@51.861,14.777 cw(c51.356,14.272) 52.07,14.272 ; v3@51.861,14.777 cw(c51.356,14.272) 52.07,14.272 ; v3@51.861,14.777 cw(c51.356,14.272) 52.07,14.272 ; v3@51.861,14.777 cw(c51.356,14.272) 52.07,14.272 ; v3@62.783,14.65 cw(c62.278,14.145) 62.992,14.145 ; v3@62.783,14.65 cw(c62.278,14.145) 62.992,14.145 ; v3@62.783,14.65 cw(c62.278,14.145) 62.992,14.145 ; v3@62.783,14.65 cw(c62.278,14.145) 62.992,14.145 ; v3@78.096,14.614 cw(c75.928,12.446) R35.1@78.994,12.446 ; v3@78.096,14.614 cw(c75.928,12.446) R35.1@78.994,12.446 ; v3@78.096,14.614 cw(c75.928,12.446) R35.1@78.994,12.446 ; v3@78.096,14.614 cw(c75.928,12.446) R35.1@78.994,12.446 ; v3@88.042,14.915 cw(c87.713,14.32) 88.392,14.32 ; v3@88.042,14.915 cw(c87.713,14.32) 88.392,14.32 ; v3@88.042,14.915 cw(c87.713,14.32) 88.392,14.32 ; v3@88.056,14.904 cw(c87.244,14.092) 88.392,14.092 ; v3@88.056,14.904 cw(c87.244,14.092) 88.392,14.092 ; v3@88.056,14.904 cw(c87.244,14.092) 88.392,14.092 ; v3@96.184,14.65 cw(c95.679,14.145) 96.393,14.145 ; v3@96.184,14.65 cw(c95.679,14.145) 96.393,14.145 ; v3@96.184,14.65 cw(c95.679,14.145) 96.393,14.145 ; 104.14,13.366 ccw(c105.314,13.366) R41.1@104.484,12.536 ; 104.14,13.366 ccw(c105.314,13.366) R41.1@104.484,12.536 ; 104.14,13.366 ccw(c105.314,13.366) R41.1@104.484,12.536
  Top Layer w1.524: v5(56.515,26.797) U8.5@56.515,28.956 U8.6@56.515,30.226 U8.7@56.515,31.496 U8.8@56.515,32.766
  Bottom Layer w1.016: v4(9.652,15.367) 10.287,16.002 19.304,16.002 ; v3(18.161,14.859) 19.304,16.002 ; v3(26.035,14.478) 26.035,14.859 27.178,16.002 ; v3(35.941,14.859) 35.941,15.113 36.83,16.002 ; v3(43.942,14.351) 43.942,14.605 43.815,14.732 43.815,16.002 ; v3(51.816,14.732) 51.181,15.367 ; v3(62.738,14.605) 61.722,15.621 61.722,16.002 ; v3(70.993,14.478) 70.866,14.605 70.866,14.859 70.231,15.494 70.231,16.002 ; v3(77.978,14.732) 77.978,14.986 76.962,16.002 ; v3(88.011,14.859) 88.011,16.002 ; v3(96.139,14.605) 96.139,16.002 ; 96.139,16.51 96.139,16.002 ; v4@9.742,15.277 cw(c11.492,13.527) 11.492,16.002 ; v4@9.742,15.277 cw(c11.492,13.527) 11.492,16.002 ; v4@9.742,15.277 cw(c11.492,13.527) 11.492,16.002 ; 19.304,16.002 27.178,16.002 ; v3@25.971,14.478 cw(c26.738,14.478) 26.196,15.02 ; v3@25.971,14.478 cw(c26.738,14.478) 26.196,15.02 ; v3@25.971,14.478 cw(c26.738,14.478) 26.196,15.02 ; v3@25.971,14.478 cw(c26.738,14.478) 26.196,15.02 ; 27.178,16.002 36.83,16.002 ; 36.83,16.002 43.815,16.002 ; 43.815,16.002 51.181,16.002 ; 51.181,15.367 ccw(c51.883,15.367) v3@51.809,14.669 ; 51.181,15.367 ccw(c51.883,15.367) v3@51.809,14.669 ; 51.181,15.367 ccw(c51.883,15.367) v3@51.809,14.669 ; 51.181,15.367 51.181,16.002 ; 51.181,16.002 ccw(c52.941,16.002) v3@51.774,14.684 ; 51.181,16.002 ccw(c52.941,16.002) v3@51.774,14.684 ; 51.181,16.002 ccw(c52.941,16.002) v3@51.774,14.684 ; 51.181,16.002 56.769,16.002 61.722,16.002 ; 61.722,16.002 70.231,16.002 ; 70.231,16.002 76.962,16.002 ; 76.962,16.002 88.011,16.002 ; 88.011,16.002 96.139,16.002 ; 96.139,16.002 103.124,16.002 103.889,15.237 ; 103.889,15.237 cw(c103.13,14.478) v3@104.203,14.478 ; 103.889,15.237 cw(c103.13,14.478) v3@104.203,14.478 ; 103.889,15.237 cw(c103.13,14.478) v3@104.203,14.478 ; 103.889,15.237 cw(c103.13,14.478) v3@104.203,14.478 ; 103.889,15.237 cw(c103.13,14.478) v3@104.203,14.478 ; 103.889,15.237 cw(c103.13,14.478) v3@104.203,14.478
  Bottom Layer w1.524: v5(56.515,26.797) 56.515,16.256 56.769,16.002
485_A: J13.2 R57.1 R63.2 U3.6 | length 76
  Top Layer w0.254: U3.6@31.607,46.863 v1@35.306,46.863 ; 34.585,46.742 ccw(c34.822,47.151) v1@35.137,46.798 ; 34.89,46.566 ccw(c35.068,46.875) v1(35.306,46.609) ; v1@35.052,46.605 ccw(c34.782,46.6) 34.917,46.833 ccw(c35.052,47.067) v1@35.183,46.831 ; R57.1@35.306,45.339 v1(35.306,46.609) ; R63.2@35.306,47.879 v1@35.306,46.863 ; U3.6@32.729,46.741 cw(c33.024,46.445) 33.024,46.863 ; U3.6@32.729,46.741 cw(c33.024,46.445) 33.024,46.863 ; U3.6@32.729,46.741 cw(c33.024,46.445) 33.024,46.863 ; U3.6@32.729,46.985 ccw(c33.024,47.281) 33.024,46.863 ; U3.6@32.729,46.985 ccw(c33.024,47.281) 33.024,46.863 ; U3.6@32.729,46.985 ccw(c33.024,47.281) 33.024,46.863 ; v1@35.086,46.482 cw(c34.522,46.156) 35.151,45.987 ; v1@35.086,46.482 cw(c34.522,46.156) 35.151,45.987 ; v1@35.086,46.482 cw(c34.522,46.156) 35.151,45.987 ; v1@35.126,46.429 ccw(c34.08,45.383) 34.08,46.863 cw(c34.08,45.383) v1@35.126,46.429 ; v1@35.126,46.429 cw(c34.693,45.996) 35.306,45.996 ; v1@35.126,46.429 cw(c34.693,45.996) 35.306,45.996 ; v1@35.135,46.797 ccw(c34.907,47.046) 35.233,47.134 ; v1@35.135,46.797 ccw(c34.907,47.046) 35.233,47.134 ; v1@35.135,46.797 ccw(c34.907,47.046) 35.233,47.134 ; 35.165,46.04 cw(c35.72,45.891) v1@35.433,46.389 ; 35.165,46.04 cw(c35.72,45.891) v1@35.433,46.389 ; 35.165,46.04 cw(c35.72,45.891) v1@35.433,46.389 ; v1@35.179,46.389 cw(c34.892,45.891) 35.447,46.04 ; v1@35.179,46.389 cw(c34.892,45.891) 35.447,46.04 ; v1@35.179,46.389 cw(c34.892,45.891) 35.447,46.04 ; v1@35.179,46.829 ccw(c34.985,47.166) 35.36,47.065 ; v1@35.179,46.829 ccw(c34.985,47.166) 35.36,47.065 ; v1@35.179,46.829 ccw(c34.985,47.166) 35.36,47.065 ; 35.252,47.065 ccw(c35.627,47.166) v1@35.433,46.829 ; 35.252,47.065 ccw(c35.627,47.166) v1@35.433,46.829 ; 35.252,47.065 ccw(c35.627,47.166) v1@35.433,46.829 ; 35.306,45.996 cw(c35.919,45.996) 35.486,46.429 ccw(c35.919,45.996) 35.306,45.996 ; v1@35.306,46.565 cw(c34.08,46.565) 34.947,45.698 ccw(c34.08,46.565) v1@35.306,46.565 ; v1@35.306,46.565 ccw(c36.532,46.565) 35.665,45.698 cw(c36.532,46.565) v1@35.306,46.565 ; v1(35.306,46.609) ccw(c34.693,45.996) 34.693,46.863 cw(c34.693,45.996) v1(35.306,46.609) ; v1(35.306,46.609) v1@35.306,46.863 ; v1@35.306,46.863 cw(c36.068,46.863) 35.611,47.473 ccw(c36.068,46.863) v1@35.306,46.863 ; v1@35.306,46.863 ccw(c34.544,46.863) 35.001,47.473 cw(c34.544,46.863) v1@35.306,46.863 ; 35.306,47.222 cw(c34.693,47.222) 35.126,46.789 ccw(c34.693,47.222) 35.306,47.222 ; 35.306,47.222 ccw(c35.919,47.222) 35.486,46.789 cw(c35.919,47.222) 35.306,47.222 ; 35.379,47.134 ccw(c35.705,47.046) v1@35.477,46.797 ; 35.379,47.134 ccw(c35.705,47.046) v1@35.477,46.797 ; 35.379,47.134 ccw(c35.705,47.046) v1@35.477,46.797 ; 35.461,45.987 cw(c36.09,46.156) v1@35.526,46.482 ; 35.461,45.987 cw(c36.09,46.156) v1@35.526,46.482 ; 35.461,45.987 cw(c36.09,46.156) v1@35.526,46.482
  Bottom Layer w0.254: J13.2@9.008,47.947 cw(c9.964,47.751) 9.712,48.694 ; J13.2@9.144,47.919 12.101,50.876 32.258,50.876 33.477,49.657 33.477,47.295 33.528,47.244 34.163,46.609 v1(35.306,46.609) ; J13.2@9.172,47.783 ccw(c8.976,48.739) 9.919,48.487 ; 9.774,48.549 cw(c9.144,49.179) 9.144,48.288 ccw(c9.144,49.179) 9.774,48.549 ; 9.774,48.549 ccw(c10.404,47.919) 9.513,47.919 cw(c10.404,47.919) 9.774,48.549 ; 10.208,48.983 cw(c9.144,50.046) 9.144,48.542 ccw(c9.144,50.046) 10.208,48.983 ; 10.208,48.983 ccw(c11.271,47.919) 9.767,47.919 cw(c11.271,47.919) 10.208,48.983 ; 34.693,46.609 cw(c34.693,45.996) 35.126,46.429 ccw(c34.693,45.996) 34.693,46.609 ; 34.693,46.609 ccw(c34.693,47.222) 35.126,46.789 cw(c34.693,47.222) 34.693,46.609
485_B: J13.1 R56.2 R63.1 U3.7 | length 58.4
  Top Layer w0.254: U3.7@32.729,48.011 cw(c33.024,47.715) 33.024,48.133 cw(c33.024,48.551) U3.7@32.729,48.255 ; U3.7@32.757,48.046 cw(c33.612,47.552) 33.357,48.507 ; 33.02,48.133 34.036,49.149 v1(34.163,49.149) ; 33.768,48.789 ccw(c33.617,49.352) v1(34.163,49.149) ; R56.2@35.306,50.419 35.306,49.276 ; R63.1@37.592,47.879 37.592,48.895 ; v1(34.163,49.149) 35.179,49.149 ; 34.776,49.149 cw(c34.776,49.762) 34.343,49.329 ccw(c34.776,49.762) 34.776,49.149 ; 34.776,49.149 ccw(c34.776,48.536) 34.343,48.969 cw(c34.776,48.536) 34.776,49.149 ; R56.2@34.966,50.042 cw(c34.274,49.276) 35.306,49.276 ; R56.2@34.966,50.042 cw(c34.274,49.276) 35.306,49.276 ; R56.2@34.966,50.042 cw(c34.274,49.276) 35.306,49.276 ; 35.179,49.149 37.338,49.149 37.592,48.895 ; 35.179,49.149 35.306,49.276 ; 35.306,49.276 cw(c36.338,49.276) R56.2@35.646,50.042 ; 35.306,49.276 cw(c36.338,49.276) R56.2@35.646,50.042 ; 35.306,49.276 cw(c36.338,49.276) R56.2@35.646,50.042 ; R63.1@37.287,48.285 ccw(c36.83,48.895) 37.592,48.895 ; R63.1@37.287,48.285 ccw(c36.83,48.895) 37.592,48.895 ; R63.1@37.287,48.285 ccw(c36.83,48.895) 37.592,48.895 ; 37.592,48.895 ccw(c38.354,48.895) R63.1@37.897,48.285 ; 37.592,48.895 ccw(c38.354,48.895) R63.1@37.897,48.285 ; 37.592,48.895 ccw(c38.354,48.895) R63.1@37.897,48.285 ; U3.7@32.607,48.052 ccw(c32.607,48.854) 33.174,48.287 cw(c32.607,48.854) U3.7@32.607,48.052 ; U3.7@32.607,48.306 ccw(c32.607,49.721) 33.608,48.721 cw(c32.607,49.721) U3.7@32.607,48.306 ; 33.513,48.626 cw(c34.163,47.975) 34.163,48.895 ccw(c34.163,47.975) 33.513,48.626 ; 33.819,48.932 ccw(c33.602,49.149) 33.909,49.149 cw(c33.602,49.149) 33.819,48.932
  Bottom Layer w0.254: J13.1@9.144,50.419 10.033,51.308 ; v1(34.163,49.149) 34.163,49.911 32.766,51.308 10.033,51.308 ; 10.033,51.308 cw(c9.356,51.985) 9.228,51.036 ccw(c9.356,51.985) 10.033,51.308 ; 10.033,51.308 ccw(c10.71,50.631) 9.761,50.503 cw(c10.71,50.631) 10.033,51.308 ; 34.163,49.762 cw(c33.55,49.762) 33.983,49.329 ccw(c33.55,49.762) 34.163,49.762 ; 34.163,49.762 ccw(c34.776,49.762) 34.343,49.329 cw(c34.776,49.762) 34.163,49.762
485_EN: R58.2 U3.2 U3.3 U5.84 | length 87.4
  Top Layer w0.254: R58.2@26.543,42.926 28.067,42.926 ; U5.84@69.272,63.151 71.342,63.151 71.501,62.992 v1(71.501,62.611) ; R58.2@27.029,42.567 cw(c27.896,41.7) 27.896,42.926 ; R58.2@27.029,42.567 cw(c27.896,41.7) 27.896,42.926 ; R58.2@27.029,42.567 cw(c27.896,41.7) 27.896,42.926 ; R58.2@27.029,43.285 ccw(c27.896,44.152) 27.896,42.926 ; R58.2@27.029,43.285 ccw(c27.896,44.152) 27.896,42.926 ; R58.2@27.029,43.285 ccw(c27.896,44.152) 27.896,42.926
  Top Layer w0.508: U3.2@26.407,48.133 U3.3@26.407,46.863 28.321,46.863 28.575,46.609 28.575,43.434 28.067,42.926 ; 28.428,43.265 cw(c29.128,43.077) v1@28.765,43.705 ; 28.306,43.165 ccw(c27.655,43.815) 28.575,43.815 cw(c27.655,43.815) 28.306,43.165 ; 28.575,43.413 cw(c28.892,43.413) 28.756,43.7 ccw(c28.892,43.413) 28.575,43.413 ; 28.575,44.428 ccw(c29.315,44.428) 28.792,43.905 cw(c29.315,44.428) 28.575,44.428
  Bottom Layer w0.254: v1(28.702,43.815) 35.814,43.815 36.576,44.577 36.576,51.638 37.719,52.781 52.575,52.781 53.184,52.172 58.547,52.172 58.624,52.095 61.747,52.095 62.458,51.384 71.196,51.384 71.501,51.689 v1(71.501,62.611) ; 29.315,43.815 cw(c29.315,44.428) 28.882,43.995 ccw(c29.315,44.428) 29.315,43.815 ; 29.315,43.815 ccw(c29.315,43.202) 28.882,43.635 cw(c29.315,43.202) 29.315,43.815 ; 71.501,61.998 cw(c72.114,61.998) 71.681,62.431 ccw(c72.114,61.998) 71.501,61.998 ; 71.501,61.998 ccw(c70.888,61.998) 71.321,62.431 cw(c70.888,61.998) 71.501,61.998